# Altium PCB TennisButler PCB.PcbDoc (part 3 of 3)
Units mm, origin at the board's own origin, x right, y up, seen from the top; angles counter-clockwise.
Board outline 100 x 100 mm, 2 copper layers (Top Layer, Bottom Layer), stack 1.671 mm thick; 98 components, 100 nets, 459 pads, 232 vias.
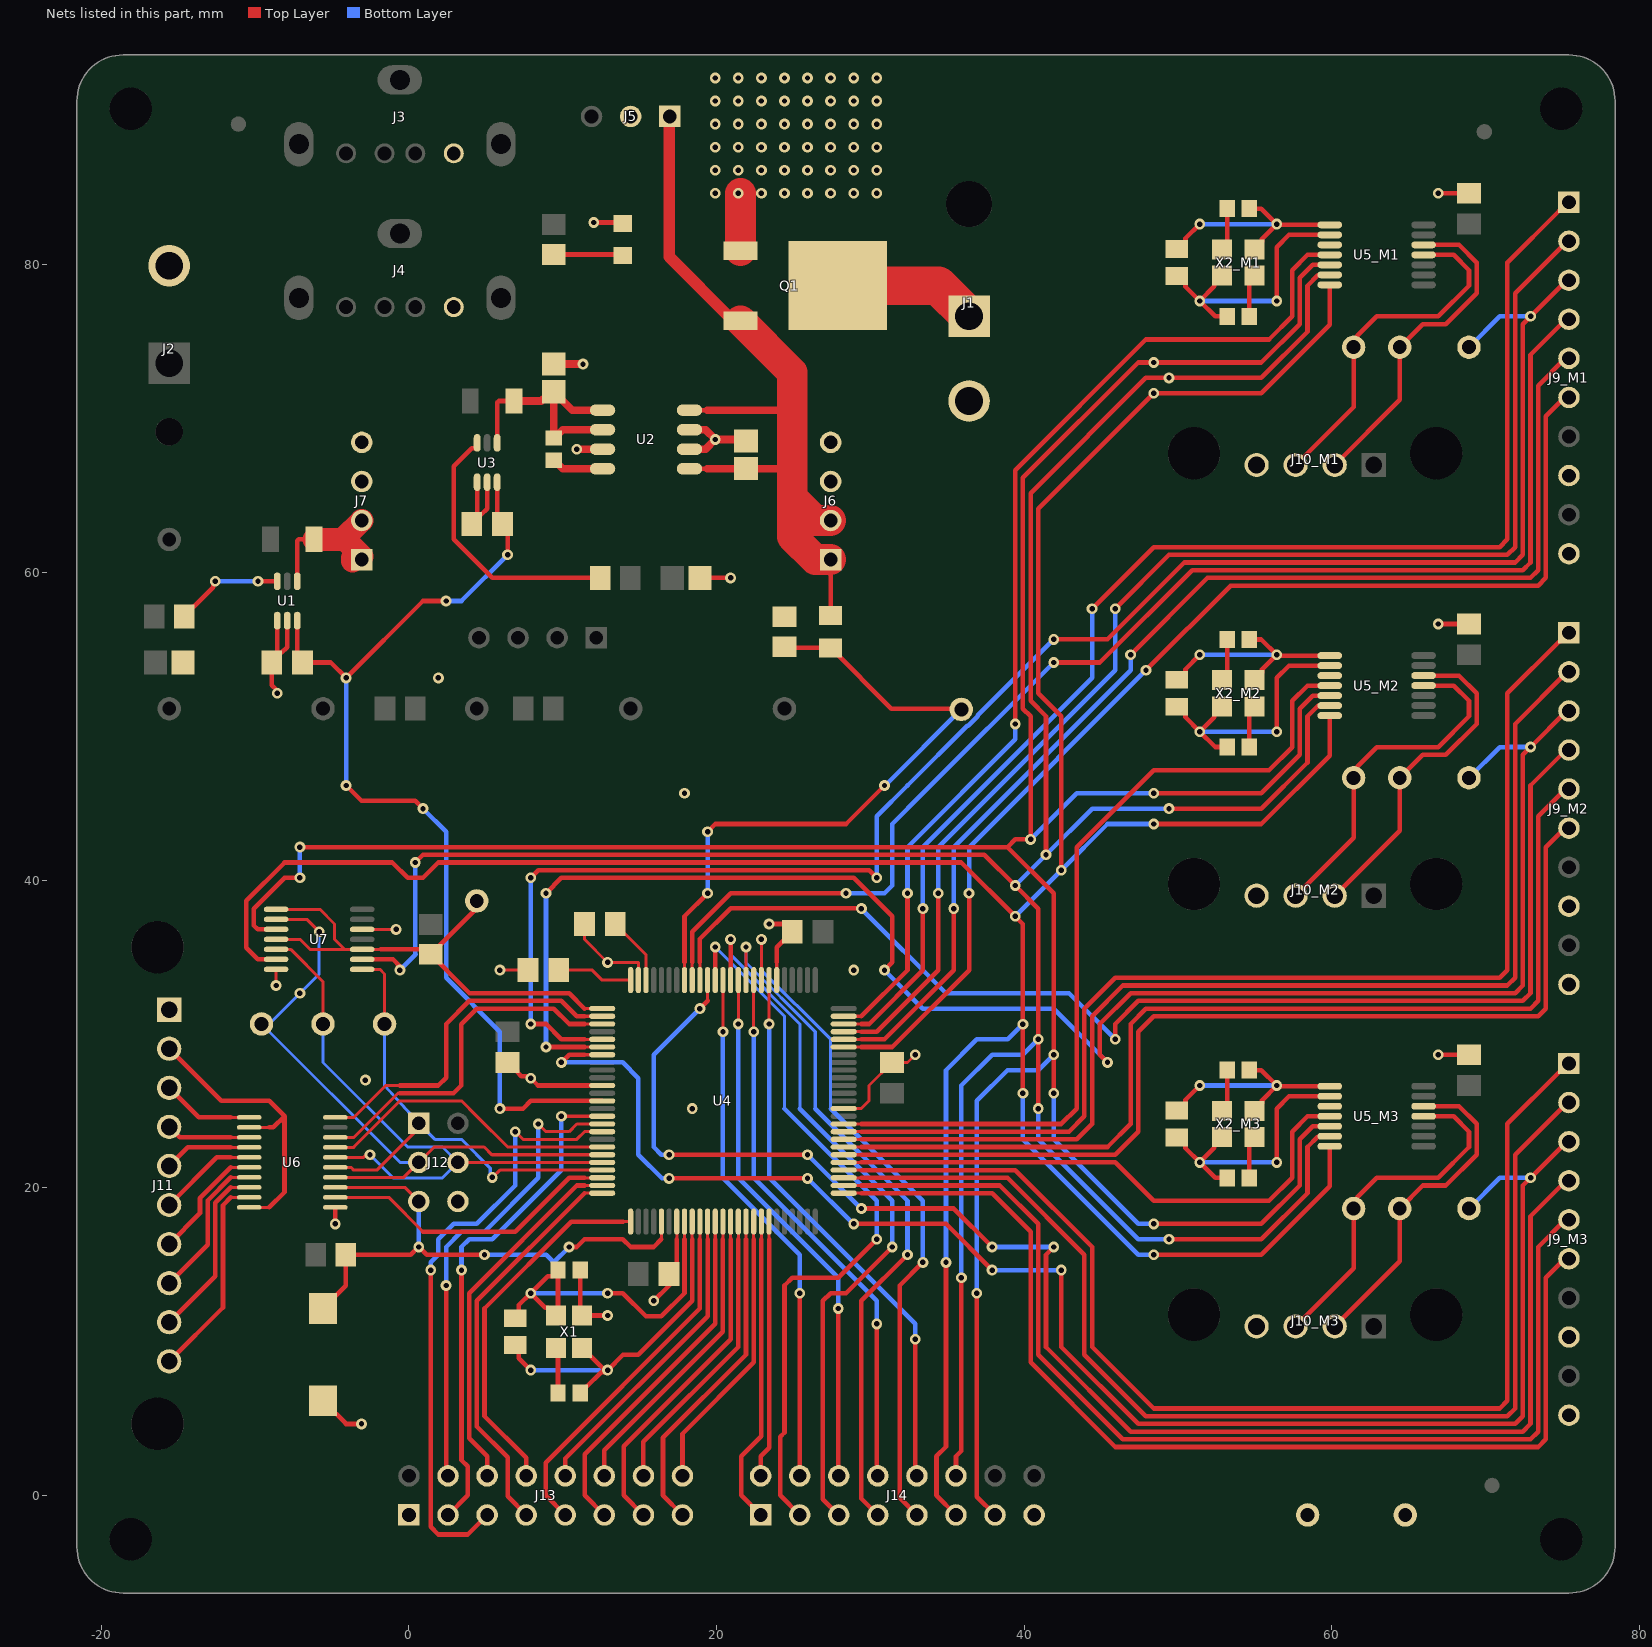
[diagram p2: the nets of this part, all layers, seen from the top]

## Via types
v1: diameter 0.7, hole 0.35, Top Layer to Bottom Layer, 117 vias
v2: diameter 0.7, hole 0.35, Top Layer to Bottom Layer, tented both sides, 115 vias

## Nets (pads, with @x,y where several pads share a name; then routed paths per layer and width w, separated by ;. In a path a pad name is that pad's centre, name@x,y a point inside that pad or via, vN(x,y) a via of type N, cw(c..) or ccw(c..) an arc to the next point about the centre after c; other vN are vias at no path point) (continued)
+12V: C5.2 J5.1 J6.1 J6.2 Q1.3 R1.2 U2.5 U2.8 | length 54.1
  Top Layer w0.3: U2.5@18.235,66.745 19.405,66.745 ; U2.8@18.235,70.555 19.41,70.555 ; 26.41,60.84 27.41,59.84 R1.2@27.41,57.2
  Top Layer w0.5: 19.405,66.745 21.905,66.745 C5.2@21.91,66.75 24.81,66.75 24.91,66.65 ; 19.41,70.555 24.91,70.555
  Top Layer w0.75: J5.1@16.91,89.65 16.91,80.52 Q1.3@21.06,76.37
  Top Layer w2: Q1.3@21.56,76.37 24.91,73.02 24.91,70.555 24.91,66.65 24.91,64.88 ; J6.1@27.41,60.84 26.41,60.84 24.91,62.34 24.91,64.88 ; J6.2@27.41,63.38 26.41,63.38 24.91,64.88
A8: J14.3 U4.89 | length 48.3
  Top Layer w0.3: U4.89@19.91,33.5 v2(19.91,35.65) ; J14.3@25.4,-1.27 24.13,0 24.13,3.81 24.41,4.09 24.41,13.65 24.91,14.15 27.91,14.15 v1(30.41,16.65)
  Bottom Layer w0.2: v2(19.91,35.65) 24.41,31.15 24.41,25.15
  Bottom Layer w0.3: 24.41,25.15 30.41,19.15 v1(30.41,16.65)
A9: J14.4 U4.88 | length 34.3
  Top Layer w0.2: v2(20.41,30.15) U4.88@20.41,33.5
  Top Layer w0.3: J14.4@25.4,1.27 25.41,1.28 v1(25.41,13.15)
  Bottom Layer w0.3: v2(20.41,30.15) 20.41,20.65 25.41,15.65 v1(25.41,13.15)
A10: J14.5 U4.87 | length 47.3
  Top Layer w0.3: U4.87@20.91,33.5 20.91,35.65 v2(20.91,36.15) ; J14.5@27.94,-1.27 26.91,-0.24 26.91,12.65 27.41,13.15 28.41,13.15 v1(31.41,16.15)
  Bottom Layer w0.2: v2(20.91,36.15) 20.91,35.15 25.41,30.65 25.41,25.15
  Bottom Layer w0.3: 25.41,25.15 31.41,19.15 v1(31.41,16.15)
A11: J14.6 U4.86 | length 34.9
  Top Layer w0.2: v1(21.41,30.65) U4.86@21.41,33.5
  Top Layer w0.3: v1(27.91,12.15) 27.91,1.3 J14.6@27.94,1.27
  Bottom Layer w0.3: v1(21.41,30.65) 21.41,20.65 26.41,15.65 27.91,14.15 v1(27.91,12.15)
A12: J14.7 U4.85 | length 45.1
  Top Layer w0.2: U4.85@21.91,33.5 v2(21.91,35.65)
  Top Layer w0.3: J14.7@30.48,-1.27 29.41,-0.2 29.41,12.65 v1(32.41,15.65)
  Bottom Layer w0.2: v2(21.91,35.65) 21.91,34.65 26.41,30.15 26.41,25.15
  Bottom Layer w0.3: 26.41,25.15 32.41,19.15 v1(32.41,15.65)
A13: J14.8 U4.84 | length 35.6
  Top Layer w0.2: v2(22.41,30.15) U4.84@22.41,33.5
  Top Layer w0.3: v1(30.41,11.15) 30.41,1.34 J14.8@30.48,1.27
  Bottom Layer w0.3: v2(22.41,30.15) 22.41,20.65 30.41,12.65 v1(30.41,11.15)
A14: J14.9 U4.83 | length 45.5
  Top Layer w0.2: U4.83@22.91,33.5 v2(22.91,36.15)
  Top Layer w0.3: J14.9@33.02,-1.27 31.91,-0.16 31.91,13.65 v1(33.41,15.15)
  Bottom Layer w0.2: v2(22.91,36.15) 22.91,34.15 27.41,29.65 27.41,25.15
  Bottom Layer w0.3: 27.41,25.15 33.41,19.15 v1(33.41,15.15)
A15: J14.10 U4.82 | length 36.2
  Top Layer w0.2: v2(23.41,30.65) U4.82@23.41,33.5
  Top Layer w0.3: v1(32.91,10.15) 32.91,1.38 J14.10@33.02,1.27
  Bottom Layer w0.3: v2(23.41,30.65) 23.41,20.65 32.91,11.15 v1(32.91,10.15)
AREF: C15.2 U4.98 | length 4.5
  Top Layer w0.2: C15.2@13.41,37.15 15.407,35.153 15.407,34.65 15.41,34.647 U4.98@15.41,33.5
AVCC: C12.2 U4.100 | length 5.3
  Top Layer w0.203: C12.2@9.41,34.15 11.91,34.15 12.56,33.5 U4.100@14.41,33.5
D6: J13.3 U4.15 | length 32.8
  Top Layer w0.2: v1(9.91,24.65) U4.15@12.56,24.65
  Top Layer w0.3: J13.3@2.54,-1.27 3.81,0 3.81,1.905 3.41,2.305 v1(3.41,14.65)
  Bottom Layer w0.3: v1(3.41,14.65) 3.41,16.15 3.91,16.65 5.41,16.65 9.91,21.15 v1(9.91,24.65)
D7: J13.4 U4.16 | length 30.9
  Top Layer w0.2: v1(8.41,24.15) 8.91,23.65 10.41,23.65 10.91,24.15 U4.16@12.56,24.15
  Top Layer w0.3: v1(2.41,13.65) 2.41,1.4 J13.4@2.54,1.27
  Bottom Layer w0.3: v1(2.41,13.65) 2.41,16.15 3.41,17.15 4.91,17.15 8.41,20.65 v1(8.41,24.15)
D8: J13.5 U4.17 | length 39.3
  Top Layer w0.2: v1(6.91,23.65) 7.41,23.15 10.91,23.15 11.41,23.65 U4.17@12.56,23.65
  Top Layer w0.3: v1(1.41,14.65) 1.41,-2.045 1.905,-2.54 3.81,-2.54 J13.5@5.08,-1.27
  Bottom Layer w0.3: v1(1.41,14.65) 1.41,15.15 1.91,15.65 1.91,16.65 2.91,17.65 4.41,17.65 6.91,20.15 v1(6.91,23.65)
D11: J13.6 U4.24 | length 23.9
  Top Layer w0.2: 11.41,20.15 U4.24@12.56,20.15
  Top Layer w0.3: J13.6@5.08,1.27 5.08,2.54 3.91,3.71 3.91,13.15 10.91,20.15 11.41,20.15
D12: J13.7 U4.25 | length 26.3
  Top Layer w0.2: 11.41,19.65 U4.25@12.56,19.65
  Top Layer w0.3: J13.7@7.62,-1.27 6.41,-0.06 6.41,2.48 4.41,4.48 4.41,12.65 11.41,19.65
D13: J13.8 U4.26 | length 23.8
  Top Layer w0.2: 13.91,17.8 U4.26@14.41,17.8
  Top Layer w0.3: J13.8@7.62,1.27 7.62,2.44 4.91,5.15 4.91,12.15 10.56,17.8 13.91,17.8
D42: J13.16 U4.42 | length 18.4
  Top Layer w0.2: 22.41,16.65 U4.42@22.41,17.8
  Top Layer w0.3: J13.16@17.78,1.27 17.78,4.02 22.41,8.65 22.41,16.65
D43: J13.15 U4.41 | length 21.8
  Top Layer w0.2: 21.91,16.65 U4.41@21.91,17.8
  Top Layer w0.3: J13.15@17.78,-1.27 16.51,0 16.51,3.75 21.91,9.15 21.91,16.65
D44: J13.14 U4.40 | length 19.1
  Top Layer w0.2: 21.41,16.65 U4.40@21.41,17.8
  Top Layer w0.3: J13.14@15.24,1.27 15.24,3.48 21.41,9.65 21.41,16.65
D45: J13.13 U4.39 | length 22.5
  Top Layer w0.2: 20.91,16.65 U4.39@20.91,17.8
  Top Layer w0.3: J13.13@15.24,-1.27 13.97,0 13.97,3.21 20.91,10.15 20.91,16.65
D46: J13.12 U4.38 | length 19.7
  Top Layer w0.2: 20.41,16.65 U4.38@20.41,17.8
  Top Layer w0.3: J13.12@12.7,1.27 12.7,2.94 20.41,10.65 20.41,16.65
D47: J13.11 U4.37 | length 23.1
  Top Layer w0.2: 19.91,16.65 U4.37@19.91,17.8
  Top Layer w0.3: J13.11@12.7,-1.27 11.43,0 11.43,2.67 19.91,11.15 19.91,16.65
D48: J13.10 U4.36 | length 20.4
  Top Layer w0.2: 19.41,16.65 U4.36@19.41,17.8
  Top Layer w0.3: J13.10@10.16,1.27 10.16,2.4 19.41,11.65 19.41,16.65
D49: J13.9 U4.35 | length 23.7
  Top Layer w0.2: 18.91,16.65 U4.35@18.91,17.8
  Top Layer w0.3: J13.9@10.16,-1.27 8.89,0 8.89,2.13 18.91,12.15 18.91,16.65
FCKI_M1: C18_M1.2 R11_M1.1 U5_M1.2 X2_M1.3 | length 18.9
  Top Layer w0.3: R11_M1.1@50.06,79.275 50.483,78.852 50.483,78.577 v2(51.41,77.65) ; X2_M1.3@52.86,79.3 52.362,78.802 52.362,78.602 v2(51.41,77.65) ; C18_M1.2@53.185,76.65 53.181,76.654 52.406,76.654 v2(51.41,77.65) ; v2(56.41,77.65) 56.41,81.15 57.21,81.95 U5_M1.2@59.86,81.95
  Bottom Layer w0.3: v2(51.41,77.65) v2(56.41,77.65)
FCKI_M2: C18_M2.2 R11_M2.1 U5_M2.2 X2_M2.3 | length 18.9
  Top Layer w0.3: R11_M2.1@50.06,51.275 50.483,50.852 50.483,50.577 v2(51.41,49.65) ; X2_M2.3@52.86,51.3 52.362,50.802 52.362,50.602 v2(51.41,49.65) ; C18_M2.2@53.185,48.65 53.181,48.654 52.406,48.654 v2(51.41,49.65) ; v2(56.41,49.65) 56.41,53.15 57.21,53.95 U5_M2.2@59.86,53.95
  Bottom Layer w0.3: v2(51.41,49.65) v2(56.41,49.65)
FCKI_M3: C18_M3.2 R11_M3.1 U5_M3.2 X2_M3.3 | length 18.9
  Top Layer w0.3: R11_M3.1@50.06,23.275 50.483,22.852 50.483,22.577 v2(51.41,21.65) ; X2_M3.3@52.86,23.3 52.362,22.802 52.362,22.602 v2(51.41,21.65) ; C18_M3.2@53.185,20.65 53.181,20.654 52.406,20.654 v2(51.41,21.65) ; v2(56.41,21.65) 56.41,25.15 57.21,25.95 U5_M3.2@59.86,25.95
  Bottom Layer w0.3: v2(51.41,21.65) v2(56.41,21.65)
FCKO_M1: C17_M1.2 R11_M1.2 U5_M1.1 X2_M1.1 | length 15.2
  Top Layer w0.3: R11_M1.2@49.91,81.025 50.06,81.025 50.483,81.448 50.483,81.723 v2(51.41,82.65) ; C17_M1.2@54.635,83.65 54.639,83.646 55.414,83.646 v2(56.41,82.65) ; X2_M1.1@54.96,81 55.458,81.498 55.458,81.698 v2(56.41,82.65) ; U5_M1.1@59.86,82.6 56.46,82.6 v2(56.41,82.65)
  Bottom Layer w0.3: v2(51.41,82.65) v2(56.41,82.65)
FCKO_M2: C17_M2.2 R11_M2.2 U5_M2.1 X2_M2.1 | length 15.2
  Top Layer w0.3: R11_M2.2@49.91,53.025 50.06,53.025 50.483,53.448 50.483,53.723 v2(51.41,54.65) ; C17_M2.2@54.635,55.65 54.639,55.646 55.414,55.646 v2(56.41,54.65) ; X2_M2.1@54.96,53 55.458,53.498 55.458,53.698 v2(56.41,54.65) ; U5_M2.1@59.86,54.6 56.46,54.6 v2(56.41,54.65)
  Bottom Layer w0.3: v2(51.41,54.65) v2(56.41,54.65)
FCKO_M3: C17_M3.2 R11_M3.2 U5_M3.1 X2_M3.1 | length 15.2
  Top Layer w0.3: R11_M3.2@49.91,25.025 50.06,25.025 50.483,25.448 50.483,25.723 v2(51.41,26.65) ; C17_M3.2@54.635,27.65 54.639,27.646 55.414,27.646 v2(56.41,26.65) ; X2_M3.1@54.96,25 55.458,25.498 55.458,25.698 v2(56.41,26.65) ; U5_M3.1@59.86,26.6 56.46,26.6 v2(56.41,26.65)
  Bottom Layer w0.3: v2(51.41,26.65) v2(56.41,26.65)
GND: C1.1 C2.1 C4.1 C5.1 C6.1 C7.1 C8.1 C9.1 C10.1 C11.1 C12.1 C13.1 C14.1 C15.1 C16_M1.1 C16_M2.1 C16_M3.1 C17_M1.1 C17_M2.1 C17_M3.1 C18_M1.1 C18_M2.1 C18_M3.1 J1.2 J2.2 J3.4 J4.4 J5.2 J6.3 J6.4 J7.3 J7.4 J9_M1.8 J9_M1.10 J9_M2.8 J9_M2.10 J9_M3.8 J9_M3.10 J10_M1.4 J10_M2.4 J10_M3.4 J11.1 J12.6 J13.1 J14.15 LED1.1 Q1.1 R2.1 S1.1 TP11.1 TP12.1 U1.1 U1.2 U2.3 U2.6 U2.7 U3.1 U3.2 U4.11 U4.32 U4.62 U4.81 U4.99 U5_M1.3 U5_M2.3 U5_M3.3 U6.11 U7.7 U7.12 X1.2 X1.4 X2_M1.2 X2_M1.4 X2_M2.2 X2_M2.4 X2_M3.2 X2_M3.4 | length 101.3
  Top Layer w0.2: v2(-8.64,33.15) U7.7@-8.64,34.2 ; U7.12@-3.04,36.8 v2(-0.84,36.8) ; v2(5.91,34.15) C12.1@7.731,34.15 ; C15.1@11.41,37.15 11.41,36.15 v2(12.91,34.65) 14.91,34.65 U4.99@14.91,33.5 ; 17.41,16.65 U4.32@17.41,17.8 ; U4.81@23.91,33.5 23.91,34.65 ; U4.62@28.26,25.15 29.41,25.15 29.91,25.65 29.91,26.65 C10.1@31.41,28.15 32.41,28.15 v1(32.91,28.65)
  Top Layer w0.3: v2(-8.565,52.15) -8.565,52.326 -8.915,52.676 C1.1@-8.915,54.15 -8.915,54.25 C1.1@-8.565,54.6 ; U1.1@-8.565,56.875 C1.1@-8.565,54.6 ; U1.2@-7.915,56.875 -7.915,55.15 -8.292,54.773 -8.392,54.773 C1.1@-8.565,54.6 ; v2(-4.79,17.65) U6.11@-4.79,18.725 ; C6.1@4.085,63.15 4.085,63.25 C6.1@4.435,63.6 ; U3.1@4.435,65.875 C6.1@4.435,63.6 ; U3.2@5.085,65.875 5.085,64.15 4.708,63.773 4.608,63.773 C6.1@4.435,63.6 ; C8.1@6.41,28.15 6.51,28.15 7.033,27.627 7.033,27.527 7.302,27.258 7.777,27.258 v2(7.91,27.125) 8.385,26.65 U4.11@12.56,26.65 ; X1.4@9.507,9.55 9.685,9.372 C13.1@9.685,6.65 ; C14.1@11.135,14.65 11.135,11.722 11.157,11.7 X1.2@11.26,11.7 v1(12.91,11.7) ; v2(12.01,82.75) LED1.1@13.91,82.75 ; v2(15.91,12.65) 16.91,13.65 C11.1@16.91,14.4 ; C11.1@16.606,14.096 C11.1@16.91,14.4 ; 17.41,16.65 17.41,14.9 C11.1@16.91,14.4 ; C7.1@18.914,59.65 v2(20.91,59.65) ; C5.1@21.81,68.813 C5.1@21.91,68.713 ; v1(23.41,37.15) 24.41,37.15 C9.1@24.91,36.65 23.91,35.65 23.91,34.65 ; X2_M3.2@52.86,25 53.185,25.325 C17_M3.1@53.185,27.65 ; X2_M2.2@52.86,53 53.185,53.325 C17_M2.1@53.185,55.65 ; X2_M1.2@52.86,81 53.185,81.325 C17_M1.1@53.185,83.65 ; C18_M3.1@54.635,20.65 54.635,22.975 X2_M3.4@54.96,23.3 ; C18_M2.1@54.635,48.65 54.635,50.975 X2_M2.4@54.96,51.3 ; C18_M1.1@54.635,76.65 54.635,78.975 X2_M1.4@54.96,79.3 ; v2(66.91,28.65) C16_M3.1@68.91,28.65 ; v2(66.91,56.65) C16_M2.1@68.91,56.65 ; v2(66.91,84.65) C16_M1.1@68.91,84.65
  Top Layer w0.305: S1.1@-5.59,6.15 -5.59,6.05 -4.842,5.302 -4.742,5.302 -4.09,4.65 v2(-3.09,4.65)
  Top Layer w0.5: C4.1@9.41,73.55 v2(11.31,73.55) ; v2(10.91,68.015) U2.3@12.585,68.015 ; U2.6@18.235,68.015 18.236,68.016 19.276,68.016 v2(19.91,68.65) ; U2.7@18.235,69.285 18.236,69.284 19.276,69.284 v2(19.91,68.65) ; C5.1@21.91,68.55 21.81,68.65 v2(19.91,68.65)
  Top Layer w2: Q1.1@21.56,80.93 v2@21.56,84.65
  other v1: 18.41,25.15 -2.834,27.003 28.91,34.15 17.91,45.65 1.91,53.15
  other v2: 19.91,84.65 21.41,84.65 22.91,84.65 24.41,84.65 25.91,84.65 27.41,84.65 28.91,84.65 30.41,84.65 19.91,86.15 21.41,86.15 22.91,86.15 24.41,86.15 25.91,86.15 27.41,86.15 28.91,86.15 30.41,86.15 19.91,87.65 21.41,87.65 22.91,87.65 24.41,87.65 25.91,87.65 27.41,87.65 28.91,87.65 30.41,87.65 19.91,89.15 21.41,89.15 22.91,89.15 24.41,89.15 25.91,89.15 27.41,89.15 28.91,89.15 30.41,89.15 19.91,90.65 21.41,90.65 22.91,90.65 24.41,90.65 25.91,90.65 27.41,90.65 28.91,90.65 30.41,90.65 19.91,92.15 21.41,92.15 22.91,92.15 24.41,92.15 25.91,92.15 27.41,92.15 28.91,92.15 30.41,92.15
I2C.SCL: J14.1 U4.43 | length 20.1
  Top Layer w0.2: 22.91,16.65 U4.43@22.91,17.8
  Top Layer w0.3: J14.1@22.86,-1.27 21.59,0 21.59,2.54 22.91,3.86 22.91,16.65
I2C.SDA: J14.2 U4.44 | length 16.8
  Top Layer w0.2: 23.41,16.65 U4.44@23.41,17.8
  Top Layer w0.3: J14.2@22.86,1.27 22.86,2.54 23.41,3.09 23.41,5.15 23.41,16.65
MCTL1.ENA: J9_M1.2 U4.72 | length 85.1
  Top Layer w0.2: U4.72@28.26,30.15 29.41,30.15
  Top Layer w0.3: 29.41,30.15 30.41,30.15 34.41,34.15 v1(34.41,39.15) ; v1(45.91,57.65) 49.41,61.15 71.41,61.15 71.91,61.65 71.91,78.15 75.3,81.54 J9_M1.2@75.41,81.54
  Bottom Layer w0.3: v1(34.41,39.15) 34.41,42.15 44.91,52.65 45.91,53.65 v1(45.91,57.65)
MCTL1.ENB: J9_M1.5 U4.71 | length 77.8
  Top Layer w0.2: U4.71@28.26,29.65 29.41,29.65
  Top Layer w0.3: 29.41,29.65 30.91,29.65 35.41,34.15 v1(35.41,38.15) ; v1(46.91,54.65) 51.91,59.65 72.91,59.65 73.41,60.15 73.41,72.15 75.18,73.92 J9_M1.5@75.41,73.92
  Bottom Layer w0.3: v1(35.41,38.15) 35.41,42.15 46.91,53.65 v1(46.91,54.65)
MCTL1.INA: J9_M1.1 U4.73 | length 87.1
  Top Layer w0.2: U4.73@28.26,30.65 29.41,30.65
  Top Layer w0.3: 29.41,30.65 29.91,30.65 33.41,34.15 v1(33.41,38.15) ; v1(44.41,57.65) 48.41,61.65 70.91,61.65 71.41,62.15 71.41,80.15 74.794,83.534 74.864,83.534 J9_M1.1@75.41,84.08
  Bottom Layer w0.3: v1(33.41,38.15) 33.41,42.15 43.91,52.65 44.41,53.15 v1(44.41,57.65)
MCTL1.INB: J9_M1.6 U4.70 | length 75.5
  Top Layer w0.2: U4.70@28.26,29.15 29.41,29.15
  Top Layer w0.3: 29.41,29.15 31.41,29.15 36.41,34.15 v1(36.41,39.15) ; v2(47.91,53.65) 53.41,59.15 73.41,59.15 73.91,59.65 73.91,70.15 75.14,71.38 J9_M1.6@75.41,71.38
  Bottom Layer w0.3: v1(36.41,39.15) 36.41,42.15 v2(47.91,53.65)
MCTL1.PWM: J9_M1.3 TP8_M1.1 U4.5 | length 114.6
  Top Layer w0.2: 11.41,29.65 U4.5@12.56,29.65
  Top Layer w0.3: v2(7.91,30.65) 8.91,30.65 9.91,29.65 11.41,29.65 ; v1(7.91,40.15) 8.41,40.65 29.91,40.65 v1(30.41,40.15) ; v1(41.91,55.65) 45.41,55.65 50.41,60.65 71.91,60.65 72.41,61.15 72.41,76.15 v1(72.914,76.654) 75.26,79 J9_M1.3@75.41,79
  Bottom Layer w0.3: v2(7.91,30.65) v1(7.91,40.15) ; v1(30.41,40.15) 30.41,44.15 32.41,46.15 36.296,50.036 36.351,50.036 36.974,50.659 36.974,50.714 v1(41.91,55.65) ; TP8_M1.1@68.91,74.65 70.91,76.65 71.41,76.65 71.414,76.654 v1(72.914,76.654)
MCTL1.SENSE: J9_M1.4 U4.92 | length 86.9
  Top Layer w0.2: U4.92@18.41,33.5 18.41,34.65
  Top Layer w0.3: 18.41,34.65 18.41,36.65 20.91,39.15 v1(28.41,39.15) ; v1(41.91,54.15) 44.91,54.15 50.91,60.15 72.41,60.15 72.91,60.65 72.91,74.15 75.22,76.46 J9_M1.4@75.41,76.46
  Bottom Layer w0.3: v1(28.41,39.15) 30.91,39.15 31.41,39.65 31.41,43.65 33.41,45.65 v1(41.91,54.15)
MCTL2.ENA: J9_M2.2 U4.58 | length 73.5
  Top Layer w0.2: U4.58@28.26,23.15 29.41,23.15
  Top Layer w0.3: 29.41,23.15 43.41,23.15 44.41,24.15 44.41,31.15 46.41,33.15 71.41,33.15 71.91,33.65 71.91,50.15 75.3,53.54 J9_M2.2@75.41,53.54
MCTL2.ENB: J9_M2.5 U4.57 | length 67.6
  Top Layer w0.2: U4.57@28.26,22.65 29.41,22.65
  Top Layer w0.3: 29.41,22.65 45.41,22.65 46.91,24.15 46.91,30.65 47.91,31.65 72.91,31.65 73.41,32.15 73.41,44.15 75.18,45.92 J9_M2.5@75.41,45.92
MCTL2.INA: J9_M2.1 U4.59 | length 75.2
  Top Layer w0.2: U4.59@28.26,23.65 29.41,23.65
  Top Layer w0.3: 29.41,23.65 42.91,23.65 43.91,24.65 43.91,31.65 45.91,33.65 70.91,33.65 71.41,34.15 71.41,52.15 74.794,55.534 74.864,55.534 J9_M2.1@75.41,56.08
MCTL2.INB: J9_M2.6 U4.56 | length 65.9
  Top Layer w0.2: U4.56@28.26,22.15 29.41,22.15
  Top Layer w0.3: 29.41,22.15 45.91,22.15 47.41,23.65 47.41,30.15 48.41,31.15 73.41,31.15 73.91,31.65 73.91,42.15 75.14,43.38 J9_M2.6@75.41,43.38
MCTL2.PWM: J9_M2.3 TP8_M2.1 U4.6 | length 113.5
  Top Layer w0.2: 11.41,29.15 U4.6@12.56,29.15
  Top Layer w0.3: v1(8.91,29.15) 11.41,29.15 ; v1(8.91,39.15) 9.91,40.15 28.91,40.15 31.41,37.65 31.41,34.65 v1(30.91,34.15) ; v1(45.41,28.15) 44.91,28.65 44.91,30.65 46.91,32.65 71.91,32.65 72.41,33.15 72.41,48.15 v1(72.914,48.654) 75.26,51 J9_M2.3@75.41,51
  Bottom Layer w0.3: v1(8.91,29.15) v1(8.91,39.15) ; v1(30.91,34.15) 33.41,31.65 41.91,31.65 v1(45.41,28.15) ; TP8_M2.1@68.91,46.65 70.91,48.65 71.41,48.65 71.414,48.654 v1(72.914,48.654)
MCTL2.SENSE: J9_M2.4 U4.91 | length 79.8
  Top Layer w0.2: U4.91@18.91,33.5 18.91,34.65
  Top Layer w0.3: 18.91,34.65 18.91,36.175 20.91,38.175 29.385,38.175 v1(29.41,38.15) ; v1(45.91,29.65) 45.91,30.65 47.41,32.15 48.41,32.15 72.41,32.15 72.91,32.65 72.91,46.15 75.22,48.46 J9_M2.4@75.41,48.46
  Bottom Layer w0.3: v1(29.41,38.15) 34.91,32.65 42.91,32.65 v1(45.91,29.65)
MCTL3.ENA: J9_M3.2 U4.53 | length 75.5
  Top Layer w0.2: U4.53@28.26,20.65 29.41,20.65
  Top Layer w0.3: 29.41,20.65 38.91,20.65 43.91,15.65 43.91,9.15 47.91,5.15 71.41,5.15 71.91,5.65 71.91,22.15 75.3,25.54 J9_M3.2@75.41,25.54
MCTL3.ENB: J9_M3.5 U4.52 | length 71.9
  Top Layer w0.2: U4.52@28.26,20.15 29.41,20.15
  Top Layer w0.3: 29.41,20.15 36.41,20.15 38.41,20.15 40.91,17.65 40.91,9.15 46.41,3.65 72.91,3.65 73.41,4.15 73.41,16.15 75.18,17.92 J9_M3.5@75.41,17.92
MCTL3.INA: J9_M3.1 U4.54 | length 77.2
  Top Layer w0.2: U4.54@28.26,21.15 29.41,21.15
  Top Layer w0.3: 29.41,21.15 39.41,21.15 44.41,16.15 44.41,9.65 48.41,5.65 70.91,5.65 71.41,6.15 71.41,24.15 74.794,27.534 74.864,27.534 J9_M3.1@75.41,28.08
MCTL3.INB: J9_M3.6 U4.51 | length 70.2
  Top Layer w0.2: U4.51@28.26,19.65 29.41,19.65
  Top Layer w0.3: 29.41,19.65 37.91,19.65 40.41,17.15 40.41,8.65 45.91,3.15 73.41,3.15 73.91,3.65 73.91,14.15 75.14,15.38 J9_M3.6@75.41,15.38
MCTL3.PWM: J9_M3.3 TP8_M3.1 U4.7 | length 105.2
  Top Layer w0.2: 11.41,28.65 U4.7@12.56,28.65
  Top Layer w0.3: v1(9.91,28.15) 10.41,28.65 11.41,28.65 ; v2(16.91,20.61) v2(25.91,20.61) ; v2(28.91,17.65) 34.91,17.65 v1(37.91,14.65) ; v1(42.41,14.65) 42.41,9.65 47.41,4.65 71.91,4.65 72.41,5.15 72.41,20.15 v1(72.914,20.654) 75.26,23 J9_M3.3@75.41,23
  Bottom Layer w0.3: v1(9.91,28.15) 13.885,28.15 14.91,27.125 14.91,22.15 16.45,20.61 v2(16.91,20.61) ; v2(25.91,20.61) 28.87,17.65 v2(28.91,17.65) ; v1(37.91,14.65) v1(42.41,14.65) ; TP8_M3.1@68.91,18.65 70.91,20.65 71.41,20.65 71.414,20.654 v1(72.914,20.654)
MCTL3.SENSE: J9_M3.4 U4.90 | length 98.6
  Top Layer w0.2: 19.41,32.15 U4.90@19.41,33.5
  Top Layer w0.3: v2(16.91,22.15) v2(25.91,22.15) ; v2(18.91,31.65) 19.41,32.15 ; v2(29.41,18.65) 35.41,18.65 v1(37.91,16.15) ; v1(41.91,16.15) 41.41,15.65 41.41,9.65 46.91,4.15 72.41,4.15 72.91,4.65 72.91,18.15 75.22,20.46 J9_M3.4@75.41,20.46
  Bottom Layer w0.3: v2(16.91,22.15) 16.41,22.15 15.91,22.65 15.91,28.65 v2(18.91,31.65) ; v2(25.91,22.15) v2(29.41,18.65) ; v1(37.91,16.15) v1(41.91,16.15)
NetC3_1: C3.1 U2.4 | length 3.4
  Top Layer w0.5: C3.1@9.41,67.291 9.46,67.291 9.706,67.045 9.706,67.043 10.004,66.745 U2.4@12.585,66.745
NetC3_2: C3.2 C4.2 R8.1 U2.1 U2.2 U3.4 | length 16.7
  Top Layer w0.3: U3.4@5.735,68.425 5.735,71.057 5.828,71.15 R8.1@6.835,71.15
  Top Layer w0.5: R8.1@6.835,71.15 8.591,71.15 8.695,71.254 8.914,71.254 C4.2@9.41,71.75 ; C3.2@9.706,68.987 9.46,68.741 C3.2@9.41,68.741 C4.2@9.41,71.75 ; C3.2@9.706,68.987 10.004,69.285 U2.2@12.585,69.285 ; U2.1@12.585,70.555 10.605,70.555 9.931,71.229 9.931,71.254 9.435,71.75 C4.2@9.41,71.75
NetJ1_1: J1.1 Q1.2 | length 9.4
  Top Layer w2.5: Q1.2@27.86,78.65 34.41,78.65 J1.1@36.41,76.65
NetJ7_1: J7.1 J7.2 R5.1 U1.4 | length 9.2
  Top Layer w0.3: U1.4@-7.265,59.425 -7.265,62.057 -7.172,62.15 R5.1@-6.165,62.15
  Top Layer w1.5: R5.1@-6.165,62.15 -4.174,62.15 J7.1@-3.07,61.046 ; -4.237,62.213 J7.2@-3.07,63.38 ; J7.1@-3.67,60.74 J7.1@-3.67,60.946
NetJ10_M1_2: J10_M1.2 TP9_M1.1 U5_M1.12 | length 21.8
  Top Layer w0.3: J10_M1.2@60.18,66.99 64.41,71.22 TP9_M1.1@64.41,74.65 65.91,76.15 67.41,76.15 69.41,78.15 69.41,80.15 68.26,81.3 U5_M1.12@65.96,81.3
NetJ10_M1_3: J10_M1.3 TP10_M1.1 U5_M1.11 | length 23
  Top Layer w0.3: J10_M1.3@57.64,66.99 61.41,70.76 TP10_M1.1@61.41,74.65 61.643,74.883 61.643,75.383 62.91,76.65 66.91,76.65 68.91,78.65 68.91,79.65 67.91,80.65 U5_M1.11@65.96,80.65
NetJ10_M2_2: J10_M2.2 TP9_M2.1 U5_M2.12 | length 21.8
  Top Layer w0.3: J10_M2.2@60.18,38.99 64.41,43.22 TP9_M2.1@64.41,46.65 65.91,48.15 67.41,48.15 69.41,50.15 69.41,52.15 68.26,53.3 U5_M2.12@65.96,53.3
NetJ10_M2_3: J10_M2.3 TP10_M2.1 U5_M2.11 | length 23
  Top Layer w0.3: J10_M2.3@57.64,38.99 61.41,42.76 TP10_M2.1@61.41,46.65 61.643,46.883 61.643,47.383 62.91,48.65 66.91,48.65 68.91,50.65 68.91,51.65 67.91,52.65 U5_M2.11@65.96,52.65
NetJ10_M3_2: J10_M3.2 TP9_M3.1 U5_M3.12 | length 21.8
  Top Layer w0.3: J10_M3.2@60.18,10.99 64.41,15.22 TP9_M3.1@64.41,18.65 65.91,20.15 67.41,20.15 69.41,22.15 69.41,24.15 68.26,25.3 U5_M3.12@65.96,25.3
NetJ10_M3_3: J10_M3.3 TP10_M3.1 U5_M3.11 | length 23
  Top Layer w0.3: J10_M3.3@57.64,10.99 61.41,14.76 TP10_M3.1@61.41,18.65 61.643,18.883 61.643,19.383 62.91,20.65 66.91,20.65 68.91,22.65 68.91,23.65 67.91,24.65 U5_M3.11@65.96,24.65
NetLED1_2: LED1.2 R4.1 | length 5.1
  Top Layer w0.3: R4.1@9.41,80.675 13.885,80.675 LED1.2@13.91,80.65 ; LED1.2@13.46,80.65 13.96,80.65 LED1.2@13.91,80.6
NetR6_1: R6.1 U1.6 | length 7.2
  Top Layer w0.3: R6.1@-14.615,57.15 -14.615,57.25 -14.092,57.773 -13.992,57.773 -12.723,59.042 -12.723,59.292 v1(-12.59,59.425) ; v2(-9.815,59.425) U1.6@-8.565,59.425
  Bottom Layer w0.3: v1(-12.59,59.425) v2(-9.815,59.425)
NetR9_1: R9.1 U3.6 | length 17.6
  Top Layer w0.3: U3.6@4.435,68.425 4.435,68.139 4.368,68.072 4.082,68.072 2.91,66.9 2.91,62.15 5.41,59.65 R9.1@12.435,59.65
O\E\: R13.1 TP15.1 U4.1 U7.1 U7.4 U7.10 | length 33.9
  Top Layer w0.2: U7.4@-8.64,36.15 -7.09,36.15 -6.44,35.5 -4.19,35.5 ; U7.1@-8.64,38.1 -5.79,38.1 -4.84,37.15 -4.84,36.15 -4.19,35.5 ; -1.84,35.5 U7.10@-3.04,35.5 -4.19,35.5 ; 11.41,31.65 U4.1@12.56,31.65
  Top Layer w0.3: -1.84,35.5 1.085,35.5 3.935,32.65 4.41,32.65 10.41,32.65 11.41,31.65 ; R13.1@1.41,35.175 4.41,38.175 TP15.1@4.41,38.65
R\E\S\E\T\: J12.5 R12.1 S1.2 U4.30 U6.13 | length 36.2
  Top Layer w0.2: U6.13@-4.79,20.025 -0.275,20.025 J12.5@0.64,19.11 ; 16.41,16.65 16.41,16.653 U4.30@16.41,17.8
  Top Layer w0.3: S1.2@-5.59,12.15 -4.115,13.625 R12.1@-4.115,15.65 0.114,15.65 0.614,16.15 0.666,16.15 1.166,15.65 v1(4.91,15.65) ; v2(10.41,16.15) 10.91,16.15 11.41,16.65 13.907,16.65 14.407,16.15 15.907,16.15 16.41,16.653
  Bottom Layer w0.3: v1(0.64,16.15) J12.5@0.64,19.11 ; v1(4.91,15.65) 8.91,15.65 9.41,15.15 v2(10.41,16.15)
S\S\: U4.19 U6.17 | length 19.9
  Top Layer w0.2: U6.17@-4.79,22.625 -3.59,22.625 -3.578,22.637 ; -3.59,22.65 -0.59,25.65 3.41,25.65 4.41,24.65 6.41,22.65 U4.19@12.56,22.65
S\S\1: U4.74 U5_M1.4 | length 68.8
  Top Layer w0.2: U4.74@28.26,31.15 29.41,31.15
  Top Layer w0.3: 29.41,31.15 32.41,34.15 v1(32.41,39.15) ; v1(39.41,50.15) 39.41,66.65 47.91,75.15 55.91,75.15 57.41,76.65 57.41,79.65 58.41,80.65 U5_M1.4@59.86,80.65
  Bottom Layer w0.3: v1(32.41,39.15) 32.41,42.15 39.41,49.15 v1(39.41,50.15)
S\S\2: U4.60 U5_M2.4 | length 55.1
  Top Layer w0.2: U4.60@28.26,24.15 29.41,24.15
  Top Layer w0.3: 29.41,24.15 42.41,24.15 43.41,25.15 43.41,42.15 48.41,47.15 55.91,47.15 57.41,48.65 57.41,51.65 58.41,52.65 U5_M2.4@59.86,52.65
S\S\3: U4.55 U5_M3.4 | length 36.7
  Top Layer w0.2: U4.55@28.26,21.65 29.41,21.65
  Top Layer w0.3: 29.41,21.65 45.91,21.65 48.41,19.15 55.91,19.15 57.41,20.65 57.41,23.65 58.41,24.65 U5_M3.4@59.86,24.65
SBC_3V3: J11.2 U6.2 U6.10 | length 19.6
  Top Layer w0.2: U6.10@-10.39,18.725 -9.09,18.725 ; U6.2@-10.39,23.925 -9.09,23.925
  Top Layer w0.3: J11.2@-15.59,29.04 -12.2,25.65 -9.09,25.65 -8.09,24.65 ; -9.09,18.725 -8.09,19.725 -8.09,24.65 ; -9.09,23.925 -8.815,23.925 -8.09,24.65
SBC_GPIO_RESET: J11.9 U6.8 | length 11.6
  Top Layer w0.2: -11.59,20.025 U6.8@-10.39,20.025
  Top Layer w0.3: J11.9@-15.59,11.26 -12.59,14.26 -12.59,19.025 -11.59,20.025
SBC_GPIO_SHDN: J11.10 U6.9 | length 13.5
  Top Layer w0.2: -11.59,19.375 U6.9@-10.39,19.375
  Top Layer w0.3: J11.10@-15.59,8.72 -12.09,12.22 -12.09,18.875 -11.59,19.375
SBC_SHDN: U4.23 U6.12 | length 19.7
  Top Layer w0.2: U6.12@-4.79,19.375 -1.315,19.375 0.91,17.15 ; 11.41,20.65 U4.23@12.56,20.65
  Top Layer w0.3: 0.91,17.15 6.91,17.15 10.41,20.65 11.41,20.65
SBC_SPI_MISO: J11.6 U6.5 | length 6.5
  Top Layer w0.2: -11.59,21.975 U6.5@-10.39,21.975
  Top Layer w0.3: J11.6@-15.59,18.88 -12.495,21.975 -11.59,21.975
SBC_SPI_MOSI: J11.7 U6.6 | length 7.8
  Top Layer w0.2: -11.59,21.325 U6.6@-10.39,21.325
  Top Layer w0.3: J11.7@-15.59,16.34 -13.59,18.34 -13.59,19.325 -11.59,21.325
SBC_SPI_SCK: J11.8 U6.7 | length 9.7
  Top Layer w0.2: -11.59,20.675 U6.7@-10.39,20.675
  Top Layer w0.3: J11.8@-15.59,13.8 -13.09,16.3 -13.09,19.175 -11.59,20.675
SBC_SPI_SS: J11.5 U6.4 | length 5.7
  Top Layer w0.2: -11.59,22.625 U6.4@-10.39,22.625
  Top Layer w0.3: J11.5@-15.59,21.42 -14.385,22.625 -11.59,22.625
SBC_UART_RX: J11.4 U6.3 | length 5.5
  Top Layer w0.2: -11.59,23.275 U6.3@-10.39,23.275
  Top Layer w0.3: J11.4@-15.59,23.96 -15.584,23.96 -14.899,23.275 -11.59,23.275
SBC_UART_TX: J11.3 U6.1 | length 6
  Top Layer w0.2: -11.59,24.575 U6.1@-10.39,24.575
  Top Layer w0.3: J11.3@-15.59,26.5 -13.665,24.575 -11.59,24.575
SENSE_EN: C1.2 C6.2 U1.3 U3.3 U4.13 | length 66
  Top Layer w0.3: U1.3@-7.265,56.875 -7.265,54.5 C1.2@-6.915,54.15 -5.09,54.15 v1(-4.09,53.15) 0.91,58.15 v1(2.41,58.15) ; v1(-4.09,46.15) -3.09,45.15 0.41,45.15 v1(0.91,44.65) ; U3.3@5.735,65.875 5.735,63.5 C6.2@6.085,63.15 6.41,62.825 v2(6.41,61.15) ; v1(5.91,25.15) 7.41,25.15 7.91,25.65 U4.13@12.56,25.65
  Bottom Layer w0.3: v1(-4.09,46.15) v1(-4.09,53.15) ; v1(0.91,44.65) 2.41,43.15 2.41,33.65 5.91,30.15 v1(5.91,25.15) ; v1(2.41,58.15) 3.41,58.15 v2(6.41,61.15)
SPI.MISO: J12.1 TP16.1 U4.22 U6.15 U7.8 | length 32.9
  Top Layer w0.2: U6.15@-4.79,21.325 -3.765,21.325 -3.59,21.15 -2.09,21.15 0.64,23.88 J12.1@0.64,24.19 ; U7.8@-3.04,34.2 -1.89,34.2 -1.59,33.9 TP16.1@-1.59,30.65 ; v1(5.41,20.675) 5.43,20.675 5.905,21.15 9.91,21.15 U4.22@12.56,21.15
  Bottom Layer w0.2: TP16.1@-1.59,30.65 -1.59,26.65 J12.1@0.64,24.19 1.68,23.15 3.41,23.15 5.282,21.278 5.282,20.803 v1(5.41,20.675)
SPI.MOSI: J12.4 TP14.1 U4.21 U6.16 U7.5 | length 39.1
  Top Layer w0.2: U7.5@-8.64,35.5 -7.69,35.5 -5.59,33.4 TP14.1@-5.59,30.65 ; U6.16@-4.79,21.975 -2.95,21.975 -2.775,22.15 v2(-2.537,22.15) ; J12.4@3.18,21.65 3.396,21.65 U4.21@12.56,21.65
  Bottom Layer w0.2: TP14.1@-5.59,30.65 -5.59,28.15 -0.09,22.65 2.18,22.65 J12.4@3.18,21.65 2.18,20.65 -1.037,20.65 v2(-2.537,22.15)
SPI.SCK: J12.3 TP13.1 U4.20 U6.14 U7.2 | length 43.3
  Top Layer w0.2: U7.2@-8.64,37.45 -6.64,37.45 v2(-5.84,36.65) ; U6.14@-4.79,20.675 -0.335,20.675 J12.3@0.64,21.65 1.64,22.65 4.885,22.65 5.385,22.15 8.91,22.15 U4.20@12.56,22.15
  Bottom Layer w0.2: v2(-5.84,36.65) -5.84,33.9 v1(-7.09,32.65) -9.09,30.65 TP13.1@-9.59,30.65 -0.59,21.65 J12.3@0.64,21.65
SPI_CTRLD.MISO: J14.12 U5_M1.6 U5_M2.6 U5_M3.6 U7.9 | length 204
  Top Layer w0.3: U7.9@-3.04,34.85 -1.04,34.85 -0.59,34.4 v2(-0.59,34.15) ; v1(0.41,41.15) 0.91,41.65 37.41,41.65 v1(39.41,39.65) 40.91,38.15 v1(40.91,29.65) v1(40.91,25.15) ; J14.12@35.91,1.62 J14.12@35.56,1.27 35.56,2.54 35.91,2.89 v1(35.91,14.15) ; v1(41.41,41.65) 41.41,50.65 40.41,51.65 40.41,65.15 47.91,72.65 v1(49.41,72.65) 55.41,72.65 58.41,75.65 58.41,78.65 59.082,79.322 59.832,79.322 U5_M1.6@59.86,79.35 ; v1(49.41,16.65) 55.41,16.65 58.41,19.65 58.41,22.65 59.082,23.322 59.832,23.322 U5_M3.6@59.86,23.35 ; v1(49.41,44.65) 55.41,44.65 58.41,47.65 58.41,50.65 59.082,51.322 59.832,51.322 U5_M2.6@59.86,51.35
  Bottom Layer w0.3: v2(-0.59,34.15) 0.435,35.175 0.41,35.2 v1(0.41,41.15) ; v1(35.91,14.15) 35.91,26.65 37.91,28.65 39.91,28.65 v1(40.91,29.65) ; v1(39.41,39.65) v1(41.41,41.65) 44.41,44.65 v1(49.41,44.65) ; v1(40.91,25.15) 40.91,23.15 47.41,16.65 v1(49.41,16.65)
SPI_CTRLD.MOSI: J14.11 U5_M1.7 U5_M2.7 U5_M3.7 U7.6 | length 214.8
  Top Layer w0.3: U7.6@-8.64,34.85 -9.84,34.85 -10.59,35.6 -10.59,38.65 -8.09,41.15 -1.09,41.15 -0.09,40.15 0.91,40.15 1.91,41.15 35.91,41.15 v1(39.41,37.65) 39.91,37.15 v1(39.91,30.636) v1(39.91,26.15) ; v1(34.91,15.15) 34.91,3.16 34.29,2.54 34.29,0 J14.11@35.56,-1.27 ; v1(42.41,40.65) 42.41,50.65 40.91,52.15 40.91,64.15 v1(48.41,71.65) 55.41,71.65 59.86,76.1 U5_M1.7@59.86,78.7 ; v1(48.41,15.65) 55.41,15.65 59.86,20.1 U5_M3.7@59.86,22.7 ; v1(48.41,43.65) 55.41,43.65 59.86,48.1 U5_M2.7@59.86,50.7
  Bottom Layer w0.3: v1(34.91,15.15) 34.91,27.65 36.91,29.65 38.924,29.65 v1(39.91,30.636) ; v1(39.41,37.65) v1(42.41,40.65) 45.41,43.65 v1(48.41,43.65) ; v1(39.91,26.15) 39.91,23.15 47.41,15.65 v1(48.41,15.65)
SPI_CTRLD.SCK: J14.13 U5_M1.5 U5_M2.5 U5_M3.5 U7.3 | length 210.9
  Top Layer w0.3: U7.3@-8.64,36.8 -9.84,36.8 -10.09,37.05 -10.09,38.15 -8.09,40.15 v1(-7.09,40.15) ; v1(-7.09,42.15) 38.91,42.15 ; v1(36.91,13.15) 36.91,-0.08 J14.13@38.1,-1.27 ; v1(41.91,26.15) v1(41.91,28.65) 41.91,39.15 38.91,42.15 ; v1(48.41,17.65) 55.41,17.65 57.91,20.15 57.91,23.15 58.76,24 U5_M3.5@59.86,24 ; v1(48.41,45.65) 55.41,45.65 57.91,48.15 57.91,51.15 58.76,52 U5_M2.5@59.86,52 ; U5_M1.5@59.86,80 58.76,80 57.91,79.15 57.91,76.15 55.41,73.65 v1(48.41,73.65) 47.41,73.65 39.91,66.15 39.91,51.15 40.41,50.65 v1(40.41,42.65) 39.41,42.65 38.91,42.15
  Bottom Layer w0.3: v1(-7.09,40.15) v1(-7.09,42.15) ; v1(36.91,13.15) 36.91,25.65 38.91,27.65 40.91,27.65 v1(41.91,28.65) ; v1(40.41,42.65) 43.41,45.65 v1(48.41,45.65) ; v1(41.91,26.15) 41.91,23.15 47.41,17.65 v1(48.41,17.65)
UART.RX: U4.2 U6.20 | length 23
  Top Layer w0.2: U6.20@-4.79,24.575 -3.59,24.575 -1.515,26.65 -0.59,26.65 ; 11.41,31.15 U4.2@12.56,31.15
  Top Layer w0.3: -0.59,26.65 1.91,26.65 2.41,27.15 2.41,30.65 3.91,32.15 9.91,32.15 10.91,31.15 11.41,31.15
UART.TX: U4.3 U6.18 | length 23.6
  Top Layer w0.2: U6.18@-4.79,23.275 -3.59,23.275 -0.715,26.15 -0.59,26.15 ; 11.41,30.65 U4.3@12.56,30.65
  Top Layer w0.3: -0.59,26.15 2.896,26.15 3.396,26.65 3.396,30.636 4.41,31.65 9.41,31.65 10.41,30.65 11.41,30.65
VBAT_VOLTAGE: R1.1 R2.2 TP1.1 U4.93 | length 43.4
  Top Layer w0.2: U4.93@17.91,33.5 17.91,34.65
  Top Layer w0.3: 17.91,34.65 17.91,37.65 v1(19.41,39.15) ; v1(19.41,43.15) 19.91,43.65 28.41,43.65 v1(30.91,46.15) ; R2.2@24.41,55.175 24.335,55.1 R1.1@27.41,55.1 31.36,51.15 35.86,51.15 TP1.1@35.91,51.1
  Bottom Layer w0.3: v1(19.41,39.15) v1(19.41,43.15) ; v1(30.91,46.15) 30.96,46.15 TP1.1@35.91,51.1
XTAL1: C13.2 R10.2 U4.34 X1.1 | length 24.3
  Top Layer w0.2: 18.41,16.65 U4.34@18.41,17.8
  Top Layer w0.3: R10.2@7.06,9.775 7.139,9.696 7.139,8.921 v2(7.91,8.15) ; C13.2@11.135,6.65 11.135,6.7 11.483,7.048 11.533,7.048 12.502,8.017 12.777,8.017 v2(12.91,8.15) ; X1.1@11.135,9.475 X1.1@11.26,9.6 12.438,8.422 12.45,8.422 12.722,8.15 v2(12.91,8.15) ; 18.41,16.65 18.41,16.15 18.41,12.65 14.91,9.15 13.91,9.15 v2(12.91,8.15)
  Bottom Layer w0.3: v2(7.91,8.15) v2(12.91,8.15)
XTAL2: C14.2 R10.1 U4.33 X1.3 | length 25.5
  Top Layer w0.2: 17.91,16.65 U4.33@17.91,17.8
  Top Layer w0.3: R10.1@7.06,11.525 7.139,11.604 7.139,12.379 v2(7.91,13.15) ; C14.2@9.685,14.65 C14.2@9.685,14.6 ; v2(12.91,13.15) 13.907,13.15 15.407,11.65 16.41,11.65 17.91,13.15 17.91,16.65 ; v2(7.91,13.15) 9.012,14.252 9.337,14.252 C14.2@9.685,14.6 ; v2(7.91,13.15) 8.862,12.198 9.062,12.198 X1.3@9.56,11.7 9.685,11.825 C14.2@9.685,14.6
  Bottom Layer w0.3: v2(7.91,13.15) v2(12.91,13.15)
pads on no net: FID1.None FID2.None FID3.None J1.None J2.None J3.2 J3.3 J3.5 J3.6 J3.7 J4.2 J4.3 J4.5 J4.6 J4.7 J5.3 J8.3 J8.4 J9_M1.9 J9_M2.9 J9_M3.9 J10_M1.None J10_M2.None J10_M3.None J11.None U4.4 U4.8 U4.9 U4.14 U4.18 U4.27 U4.28 U4.29 U4.45 U4.46 U4.47 U4.48 U4.49 U4.50 U4.63 U4.64 U4.65 U4.66 U4.67 U4.68 U4.69 U4.75 U4.76 U4.77 U4.78 U4.79 U5_M1.8 U5_M1.9 U5_M2.8 U5_M2.9 U5_M3.8 U5_M3.9 U7.11

## Polygon pours and split planes (outlines as drawn)
GND on Bottom Layer "GND_L02_P000" (solid, remove dead copper, pour order 0): -21.59,94.65 79.41,94.65 79.41,-6.35 -21.59,-6.35
GND on Top Layer "GND_L01_P006" (solid, remove dead copper, pour order 6): -21.59,93.65 78.41,93.65 78.41,-6.35 -21.59,-6.35

## Keep-outs
Keep-Out Layer:
  circle w0: c74.91,90.15 r3.1
  circle w0: c-18.09,-2.85 r3.1
  circle w0: c74.91,-2.85 r3.1
  circle w0: c-18.09,90.15 r3.1

## Other copper
Top Layer:
  rectangle net GND: 19.41,84.15 30.91,92.65

## Silkscreen, mask and mechanical layers (free items; w line width, h text height)
Top Overlay:
  lines w0.2: -8.15,63.38 -8.15,65.92 ; -8.15,72.27 -8.15,74.81 -5.61,74.81 ; 9.63,74.81 14.71,74.81 ; 29.95,54.49 32.49,54.49 32.49,57.03 ; 29.95,74.81 32.49,74.81 32.49,72.27 ; 32.49,63.38 32.49,65.92 ; 10.91,78.15 10.91,83.65 11.41,84.15 16.41,84.15 16.91,83.65 16.91,78.15 16.41,77.65 11.41,77.65 10.91,78.15
  lines w0.5: 77.41,2.65 43.41,2.65 43.41,30.65 ; 77.41,30.65 43.41,30.65 ; 77.41,58.65 43.41,58.65 ; 77.41,86.65 43.41,86.65 43.41,58.65 ; 43.41,30.65 43.41,58.65
  text "Tennis Butler v1.1" at 43.41,89.65 h3
  text "Motor 1" at 46.959,59.65 h4 r90
  text "Motor 2" at 46.91,31.65 h4 r90
  text "Motor 3" at 46.959,3.65 h4 r90
  text "5VLO" at 0.635,3.175 h1 r90
  text "D7" at 3.175,3.175 h1 r90
  text "D11" at 5.715,3.175 h1 r90
  text "D13" at 8.255,3.175 h1 r90
  text "D48" at 10.795,3.175 h1 r90
  text "D46" at 13.335,3.175 h1 r90
  text "D44" at 15.875,3.175 h1 r90
  text "D42" at 18.415,3.175 h1 r90
  text "SDA" at 23.158,3.175 h1 r90
  text "A9" at 25.698,3.175 h1 r90
  text "A11" at 28.238,3.175 h1 r90
  text "A13" at 30.778,3.175 h1 r90
  text "A15" at 33.318,3.175 h1 r90
  text "MISO" at 35.858,3.175 h1 r90
  text "5VLO" at 38.398,3.175 h1 r90
  text "5VHI" at 40.938,3.175 h1 r90
  text "GND" at 0.635,-5.715 h1 r90
  text "D6" at 3.175,-5.715 h1 r90
  text "D8" at 5.715,-5.715 h1 r90
  text "D12" at 8.255,-5.715 h1 r90
  text "D49" at 10.795,-5.715 h1 r90
  text "D47" at 13.335,-5.715 h1 r90
  text "D45" at 15.875,-5.715 h1 r90
  text "D43" at 18.415,-5.715 h1 r90
  text "SCL" at 23.495,-5.715 h1 r90
  text "A8" at 26.035,-5.715 h1 r90
  text "A10" at 28.575,-5.715 h1 r90
  text "A12" at 31.115,-5.715 h1 r90
  text "A14" at 33.655,-5.715 h1 r90
  text "MOSI" at 36.195,-5.715 h1 r90
  text "SCK" at 38.735,-5.715 h1 r90
  text "GND" at 41.275,-5.715 h1 r90
  text "TOP" at 68.41,-5.85 h2
Bottom Overlay:
  region: 3620 vertices and 0 holes, not listed, extent 31.16,88.043 46.868,92.65
  text "Tennis Butler v1.1" at 71.41,89.65 h3
  text "BOTTOM" at -8.09,-5.85 h2
Board (Mech11):
  the board outline again, w0.1